# EAGLE board PLL_Counter (EAGLE 6.3)
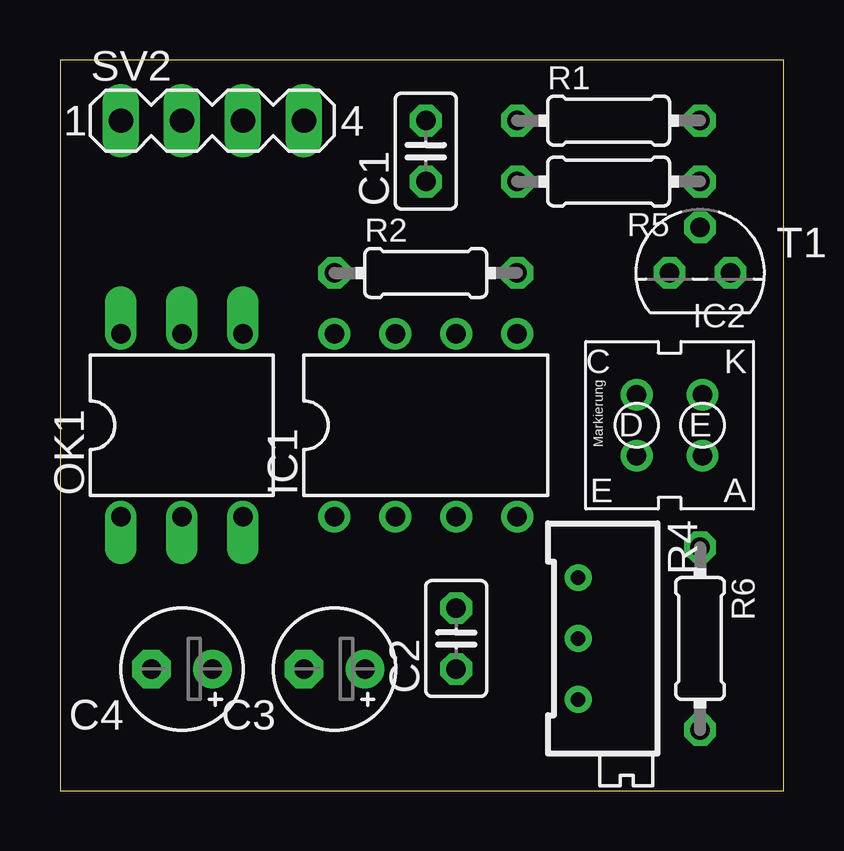
[diagram p0: board, top side]
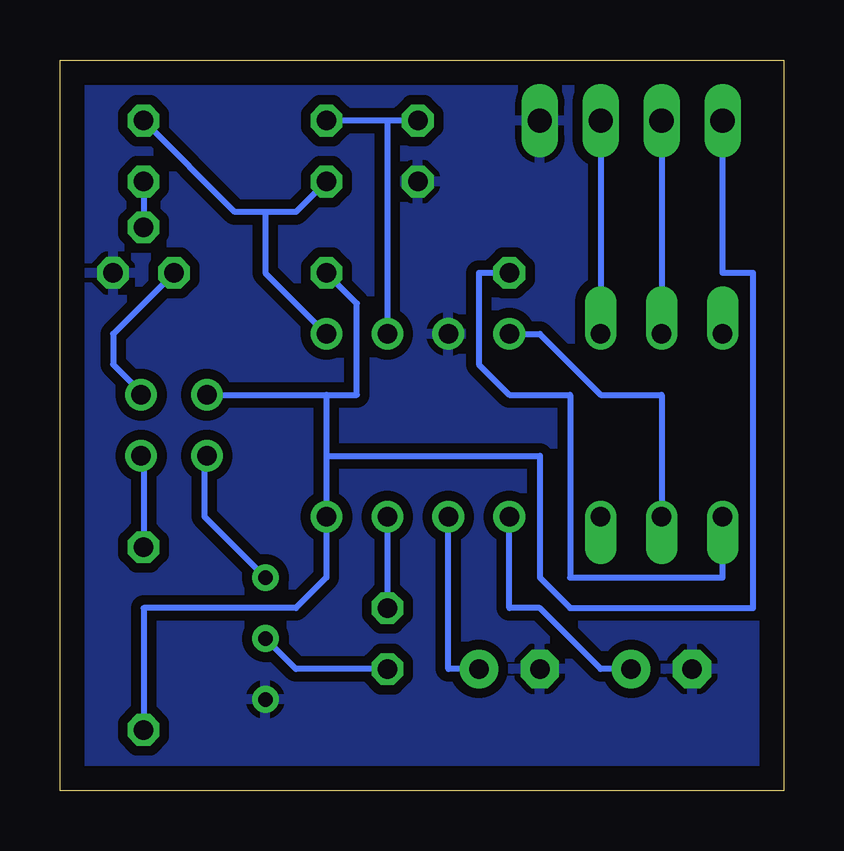
[diagram p1: board, bottom side, seen from below]

Size 30.15 x 30.47 mm. Coordinates in mm from the lower left corner, seen from the top.
Outline: 0,0 30.15,0 30.15,30.47 0,30.47 0,0
Copper layers (1*16): Top 0.035mm / dielectric 1.5mm / Bottom 0.035mm
Design rules "default *": minimum track width 10mil, minimum drill 24mil, track to track 16mil, track to pad 16mil, pad to pad 16mil, via to via 16mil, smd to smd 8mil, copper to edge 40mil, drill to drill 16mil, minimum pad ring 10mil, minimum via ring 8mil, stop-mask expansion 4mil, vias tented up to drill 0mil, thermal gap 10mil

## Footprints (pad centres in the part's own frame; a part is rotated, then mirrored left to right if it is on the bottom)
C025-025X050 = drill 0.813 octagon: 1 -1.27,0; 2 1.27,0
E2,5-5 = drill 0.813 pad 1.6: + -1.27,0 | drill 0.813 pad 1.6 octagon: - 1.27,0
DIL08 = drill 0.813 pad 1.27: 1 -3.81,-3.81; 2 -1.27,-3.81; 3 1.27,-3.81; 4 3.81,-3.81; 5 3.81,3.81; 6 1.27,3.81; 7 -1.27,3.81; 8 -3.81,3.81
CNY70 = drill 0.813: DC 1.37,-1.27; DE 1.37,1.27; EA -1.37,1.27; EK -1.37,-1.27
DIL06 = drill 0.813 offset: 1 -2.54,-3.81; 2 0,-3.81; 3 2.54,-3.81; 4 2.54,3.81; 5 0,3.81; 6 -2.54,3.81
0204/7 = drill 0.813 octagon: 1 -3.81,0; 2 3.81,0
RTRIM64X = drill 0.61: 1 1.27,-2.54; 2 1.27,0; 3 1.27,2.54
MA04-1 = drill 1.016 long: 1 -3.81,0; 2 -1.27,0; 3 1.27,0; 4 3.81,0
TO92 = drill 0.813 octagon: 1 1.27,0; 2 0,1.905; 3 -1.27,0

## Placement (x,y rotation side)
C1  100nF  [C025-025X050]  15.24,26.67 90 top
C2  100nF  [C025-025X050]  16.51,6.35 90 top
C3  1uF  [E2,5-5]  11.43,5.08 180 top
C4  1uF  [E2,5-5]  5.08,5.08 180 top
IC1  NE567N  [DIL08]  15.24,15.24 0 top
IC2  CNY70  [CNY70]  25.4,15.24 180 top
OK1  CNY17F  [DIL06]  5.08,15.24 0 top
R1  2k2  [0204/7]  22.86,27.94 0 top
R2  270  [0204/7]  15.24,21.59 0 top
R4  20k  [RTRIM64X]  22.86,6.35 180 top
R5  10k  [0204/7]  22.86,25.4 180 top
R6  470  [0204/7]  26.67,6.35 270 top
SV2  [MA04-1]  6.35,27.94 0 top
T1  BC547  [TO92]  26.67,21.59 0 top

## Library data of the parts
C1-C4 R1 R2 R5 R6 = resistor
IC1 = linear
IC2 = CNY70
OK1 = optocoupler; MF: VISHAY/TELEFUNKEN; MPN: CNY17F-3; OC_FARNELL: 1469473; OC_NEWARK: 58K0172
R4 = rcl
SV2 = con-lstb; OC_FARNELL: unknown; OC_NEWARK: unknown
T1 = transistor

## Nets
+5V: IC1.4 IC2.DC R2.2 R6.2 SV2.1
GND: C1.1 C3.- C4.- IC1.7 R4.3 SV2.4 T1.1
N$1: IC2.EK T1.3
N$2: IC1.5 R1.2 R5.2
N$3: C1.2 IC1.6 R1.1
N$4: IC1.8 OK1.2
N$5: OK1.1 R2.1
N$6: C2.2 IC1.3
N$7: IC2.DE R4.1
N$8: R5.1 T1.2
N$9: OK1.5 SV2.2
N$10: IC2.EA R6.1
N$11: C3.+ IC1.2
N$12: C4.+ IC1.1
N$13: OK1.4 SV2.3
N$14: C2.1 R4.2

## Tracks (layer width: path | path; a pad name or v marks a point on that pad's centre or on a via)
+5V
  Bottom 0.254: 19.05,16.51 19.05,13.97 | 19.05,13.97 IC1.4 19.05,8.89 20.32,7.62 26.67,7.62 R6.2 | 19.05,16.51 IC2.DC 24.13,16.51 | R2.2 17.78,20.32 17.78,16.51 19.05,16.51 | SV2.1 2.54,21.59 1.27,21.59 1.27,7.62 8.89,7.62 10.16,8.89 10.16,13.97 19.05,13.97
GND
  pour Bottom: 0,30.48 30.48,30.48 30.48,0 0,0
N$1
  Bottom 0.254: T1.3 27.94,19.05 27.94,17.78 26.67,16.51 IC2.EK
N$2
  Bottom 0.254: IC1.5 21.59,21.59 21.59,24.13 | 21.59,24.13 20.32,24.13 R5.2 | R1.2 22.86,24.13 21.59,24.13
N$3
  Bottom 0.254: 16.51,27.94 IC1.6 | C1.2 16.51,27.94 | 16.51,27.94 R1.1
N$4
  Bottom 0.254: OK1.2 5.08,16.51 7.62,16.51 10.16,19.05 IC1.8
N$5
  Bottom 0.254: OK1.1 2.54,8.89 8.89,8.89 8.89,16.51 11.43,16.51 12.7,17.78 12.7,21.59 R2.1
N$6
  Bottom 0.254: IC1.3 C2.2
N$7
  Bottom 0.254: R4.1 24.13,11.43 24.13,13.97 IC2.DE
N$8
  Bottom 0.254: R5.1 T1.2
N$9
  Bottom 0.254: SV2.2 OK1.5
N$10
  Bottom 0.254: R6.1 26.67,13.97 IC2.EA
N$11
  Bottom 0.254: IC1.2 13.97,5.08 C3.+
N$12
  Bottom 0.254: IC1.1 11.43,7.62 10.16,7.62 7.62,5.08 C4.+
N$13
  Bottom 0.254: SV2.3 OK1.4
N$14
  Bottom 0.254: R4.2 20.32,5.08 C2.1